# Altium PCB pilar_3_2 vers.PcbDoc
Units mm, origin at the board's own origin, x right, y up, seen from the top; angles counter-clockwise.
Board outline 20 x 50.01 mm, 2 copper layers (Top Layer, Bottom Layer); 6 components, 3 nets, 16 pads, 1 vias.
Unrouted connection lines stored in the file: 1.
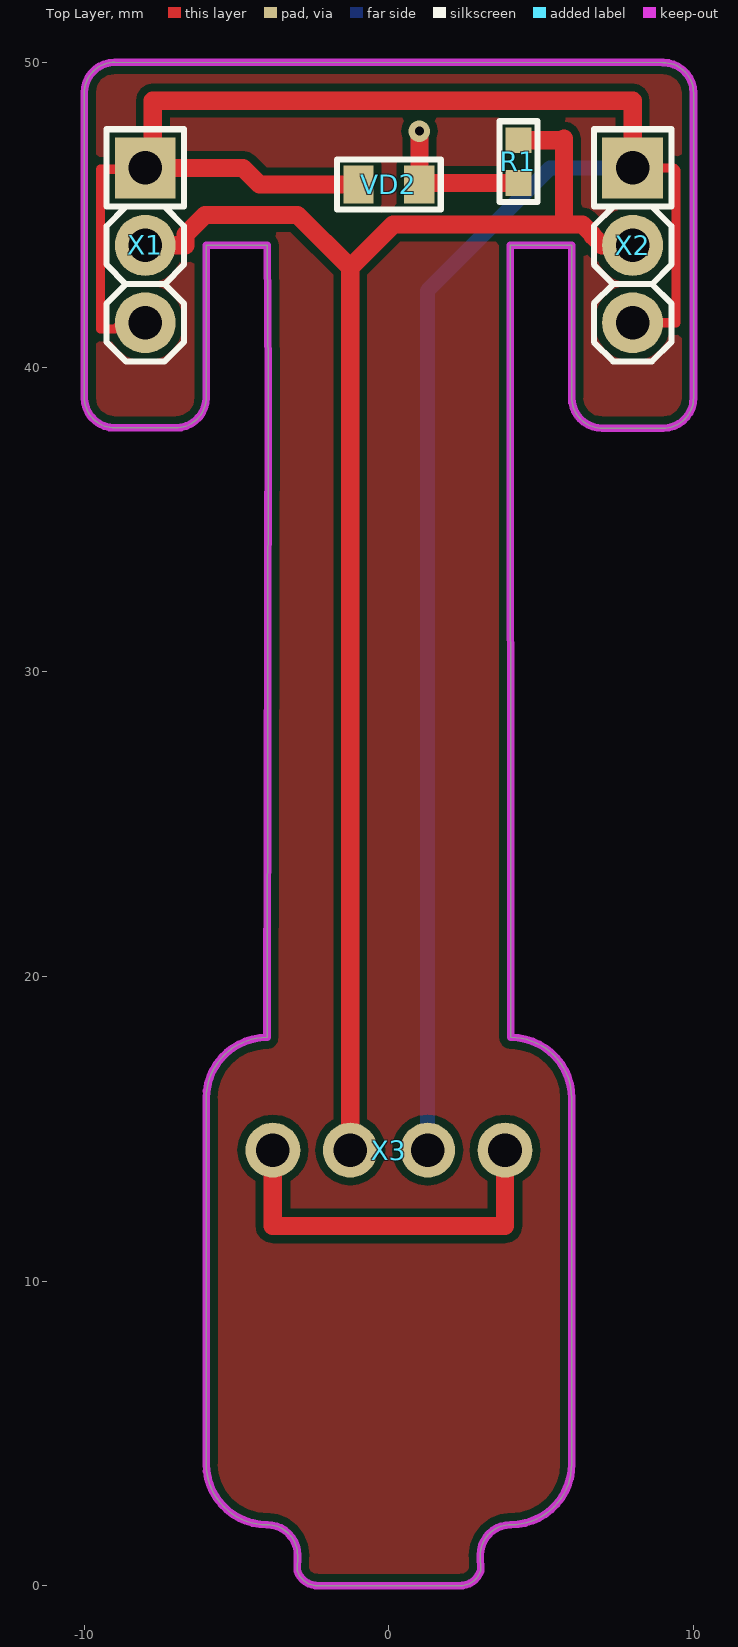
[diagram p0: Top Layer view]
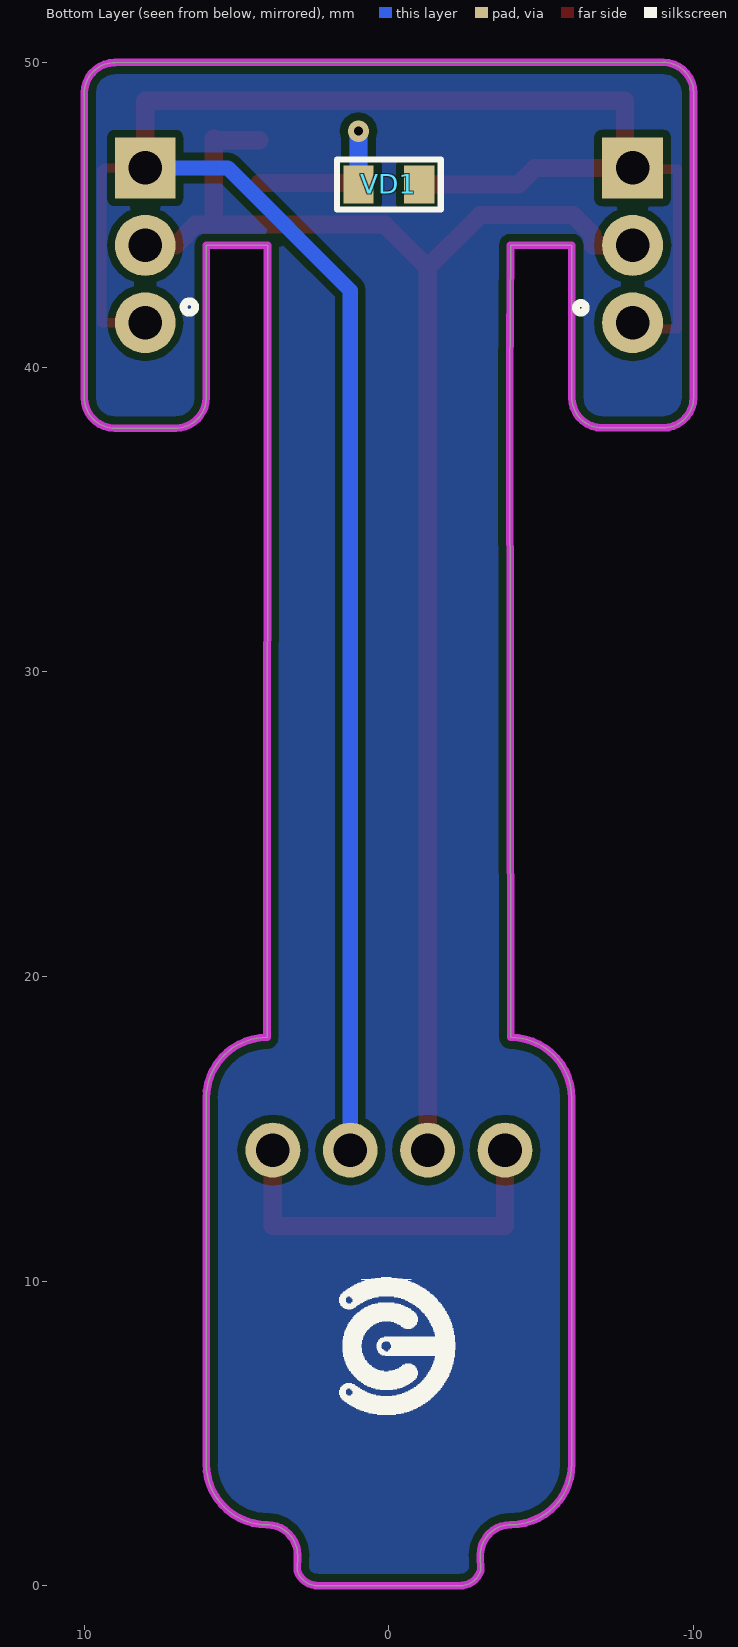
[diagram p1: Bottom Layer view, seen from below]

## Layer stack, top to bottom
Top Solder: solder mask 0.0102, Solder Resist, Dk 3.5
Top Layer: signal copper 0.0356
Dielectric 1: dielectric 0.32, FR-4, Dk 4.8
Bottom Layer: signal copper 0.0356
Bottom Solder: solder mask 0.0102, Solder Resist, Dk 3.5

## Board outline
-6,4 -6,16 cw(c-4,16) -4,18 -3.964,39.516 -3.992,44 -6,44 -6,40.509 -6,39.009 cw(c-7,39.009) -7,38.009 -9,38.009 cw(c-9,39.009) -10,39.009 -10,49.009 cw(c-9,49.009) -9,50.009 9,50 cw(c9,49) 10,49 10,39 cw(c9,39) 9,38 7,38 cw(c7,39) 6,39 6,40.5 6,44 3.985,44 4,18 cw(c4,16) 6,16 6,4 cw(c4,4) 4,2 ccw(c4,1) 3,1 3.011,0.5 cw(c2.337,0.703) 2.3,0 -2.3,0 cw(c-2.337,0.703) -3.011,0.5 -3,1 ccw(c-4,1) -4,2 cw(c-4,4)

## Design rules (kind name [scope] priority, off if disabled: settings)
Clearance [All] p1: gap=0.254 ignorepadtopadclearanceinfootprint=FALSE except(0: Arc-Hole Track-Hole SMDPad-Hole THPad-Hole Via-Hole Fill-Hole Poly-Hole Region-Hole Text-Hole)
PolygonConnect [All] p1: connectstyle=Relief reliefconductorwidth=0.254 reliefentries=4 polygonreliefangle="90 Angle" airgapwidth=0.254
RoutingVias [All] p1: holewidth=0.711 width=1.27 viastyle="Through Hole" minholewidth=0.711 minwidth=1.27 maxholewidth=0.711 maxwidth=1.27
SolderMaskExpansion [All] p1: expansion=0.102
Width [All] p1: maxlimit=10 minlimit=0.254 preferedwidth=0.254 minimp=50.000000 maximp=50.000000 favimp=50.000000
30 further rules are at their usual default settings.

## Classes and differential pairs
component class "pilar_3_2 vers": R1 VD1 VD2 X1 X2

## Components (designator, comment, footprint, x,y, rotation, side; value= is the part's Value field where it differs from the comment)
R1 "Resistor film, 100R, ±5%, 0603, 0.1W, -55...+125°C" "RES: 0603" 4.25,46.75 r270 top value=100R
VD1 "LED, *, *, *, -55...+150°C" "LED: 0805R" 0,46 r180 bottom
VD2 "LED, *, *, *, -55...+150°C" "LED: 0805R" 0,46 r180 top
X1 "Connector, 3pin, 2.54mm, 500VAC, 3A" "CON: PLS-3" -8,44 r270 top
X2 "Connector, 3pin, 2.54mm, 500VAC, 3A" "CON: PLS-3" 8,44 r270 top
X3 "Connector, 4pin, 2.54mm, 500VAC, 3A" "4PLS RIGHT ANGLE 2" 0,14.3 r180 top

## Footprints (in the part's own frame and the unit in brackets; to place one, negate y for a bottom-side part, rotate by r counter-clockwise, add the part's x,y. Pads: shape width x height; smd on the part's side, far side on the other; paste and mask are expansions set on the pad)
"4PLS RIGHT ANGLE 2" [mm]
  round 1.8 hole 1.1: 1(-3.81,0) 2(-1.27,0) 3(1.27,0) 4(3.81,0)
  body extent -5.04,-0.32 5.14,10.04, height 2.57
"CON: PLS-3" [mm]
  rect 2x2 hole 1.1: 1(-2.54,0)
  round 2 hole 1.1: 2(0,0) 3(2.54,0)
  silkscreen extent -3.81,-1.27 3.81,1.27, body extent -3.81,-1.27 3.81,1.27, height 8.54
"LED: 0805R" [mm]
  rect 1x1.25 smd: 1(-1,0) 2(1,0)
  silkscreen extent -1.7,-0.82 1.7,0.82, body extent -1.05,-0.67 1.05,0.68, height 0.9
"RES: 0603" [mm]
  rect 0.85x0.85 smd: 1(-0.7,0) 2(0.7,0)
  silkscreen extent -1.33,-0.63 1.33,0.63, body extent -0.8,-0.4 0.8,0.4, height 0.44

## Part data
R1: library part Resistor_0603, Manufacturer=Yageo, Package=0603, PartNumber=RC0603JR-07100RL, Power=0.1W, Temperature=-55...+125°C, Tolerance=±5%, TypeResistor="Resistor film", HelpURL=https://www.digikey.com/product-detail/en/yageo/RC0603JR-07100RL/311-100GRCT-ND/729644, ValueManufacturerPartNumber="Resistor film, 100R, ±5%, 0603, 0.1W, -55...+125°C"
VD1 VD2: library part LED_single, Color=GREEN, Temperature=-55...+150°C, TypeDiode=LED, ValueManufacturerPartNumber="LED, *, *, *, -55...+150°C"
X1 X2: library part PLS-3, CurrentMax=3A, Manufacturer=Connfly, VoltageMax=500VAC, CommentText="\"Ðàçúåì\"", HelpURL=https://www.chipdip.ru/product/pls-3, Multichannel=3pin, PartNumber=PLS-3, Pitch=2.54mm, TypeConnector=Connector, ValueManufacturerPartNumber="Connector, 3pin, 2.54mm, 500VAC, 3A"
X3: library part PLS-4, CurrentMax=3A, Manufacturer=Connfly, VoltageMax=500VAC, CommentText="\"Ðàçúåì\"", HelpURL=https://www.chipdip.ru/product/pls-4, Multichannel=4pin, PartNumber=PLS-4, Pitch=2.54mm, TypeConnector=Connector, ValueManufacturerPartNumber="Connector, 4pin, 2.54mm, 500VAC, 3A"

## Via types
v1: diameter 0.7, hole 0.3, Top Layer to Bottom Layer, 1 vias

## Nets (pads, with @x,y where several pads share a name; then routed paths per layer and width w, separated by ;. In a path a pad name is that pad's centre, name@x,y a point inside that pad or via, vN(x,y) a via of type N, cw(c..) or ccw(c..) an arc to the next point about the centre after c; other vN are vias at no path point)
GND: VD1.2 VD2.2 X1.1 X1.3 X2.1 X2.3 X3.2 | length 80.3
  Top Layer w0.3: X1.3 -8.79,41.46 -9,41.25 -9.469,41.25 -9.469,46.5 -8.04,46.5 X1.1 ; X2.3 9.429,41.46 9.429,46.46 9.349,46.54 X2.1
  Top Layer w0.6: VD2.2 -4.25,46 -4.79,46.54 X1.1 -7.75,46.79 -7.75,48.75 8,48.75 X2.1
  Bottom Layer w0.5: X3.2 1.27,42.52 5.29,46.54 X2.1
NetR1_2: R1.2 VD1.1 VD2.1 | length 6.8
  Top Layer w0.6: v1(1,47.75) VD2.1 1.05,46.05 R1.2
  Bottom Layer w0.6: VD1.1 v1(1,47.75)
VCC: R1.1 X1.2 X2.2 X3.3 | length 51.5
  Top Layer w0.6: X1.2 -6.681,44 -6.681,44.356 -6.037,45 -3,45 -1.27,43.27 ; X3.3 -1.27,43.27 ; R1.1 5.7,47.45 5.75,47.5 5.75,44.681 ; X2.2 7,44 6.681,44.319 6.681,44.356 6.356,44.681 5.75,44.681 ; -1.27,43.27 0.141,44.681 4.341,44.681 5.75,44.681
pads on no net: X3.1 X3.4
copper on no net: | length 12.6
  Top Layer w0.6: -3.81,14.3 -3.81,11.81 3.81,11.81 3.81,14.3

## Polygon pours and split planes (outlines as drawn)
no net on Top Layer "Top Layer-No Net" (solid, pour order 0): -6,4 -6,16 cw(c-4,16) -4,18 -3.964,39.516 -3.992,44 -6,44 -6,40.509 -6,39.009 cw(c-7,39.009) -7,38.009 -9,38.009 cw(c-9,39.009) -10,39.009 -10,49.009 cw(c-9,49.009) -9,50.009 9,50 cw(c9,49) 10,49 10,39 cw(c9,39) 9,38 7,38 cw(c7,39) 6,39 6,40.5 6,44 3.985,44 4,18 cw(c4,16) 6,16 6,4 cw(c4,4) 4,2 ccw(c4,1) 3,1 3.011,0.5 cw(c2.337,0.703) 2.3,0 -2.3,0 cw(c-2.337,0.703) -3.011,0.5 -3,1 ccw(c-4,1) -4,2 cw(c-4,4)
no net on Bottom Layer "Top Layer-No Net1" (solid, pour order 1): -6,4 -6,16 cw(c-4,16) -4,18 -3.964,39.516 -3.992,44 -6,44 -6,40.509 -6,39.009 cw(c-7,39.009) -7,38.009 -9,38.009 cw(c-9,39.009) -10,39.009 -10,49.009 cw(c-9,49.009) -9,50.009 9,50 cw(c9,49) 10,49 10,39 cw(c9,39) 9,38 7,38 cw(c7,39) 6,39 6,40.5 6,44 3.985,44 4,18 cw(c4,16) 6,16 6,4 cw(c4,4) 4,2 ccw(c4,1) 3,1 3.011,0.5 cw(c2.337,0.703) 2.3,0 -2.3,0 cw(c-2.337,0.703) -3.011,0.5 -3,1 ccw(c-4,1) -4,2 cw(c-4,4)

## Keep-outs
Keep-Out Layer:
  the board outline again, w0.254

## Silkscreen, mask and mechanical layers (free items; w line width, h text height)
Bottom Overlay:
  drawing of 754 lines, arcs and shapes, not listed